# Altium PCB DE-180824.PcbDoc (part 2 of 2)
Units mil, origin at the board's own origin, x right, y up, seen from the top; angles counter-clockwise.
Board outline 4852.2 x 3356.49 mil, 3 copper layers (Top Layer, Mid-Layer 2, Bottom Layer); 131 components, 108 nets, 473 pads, 80 vias.
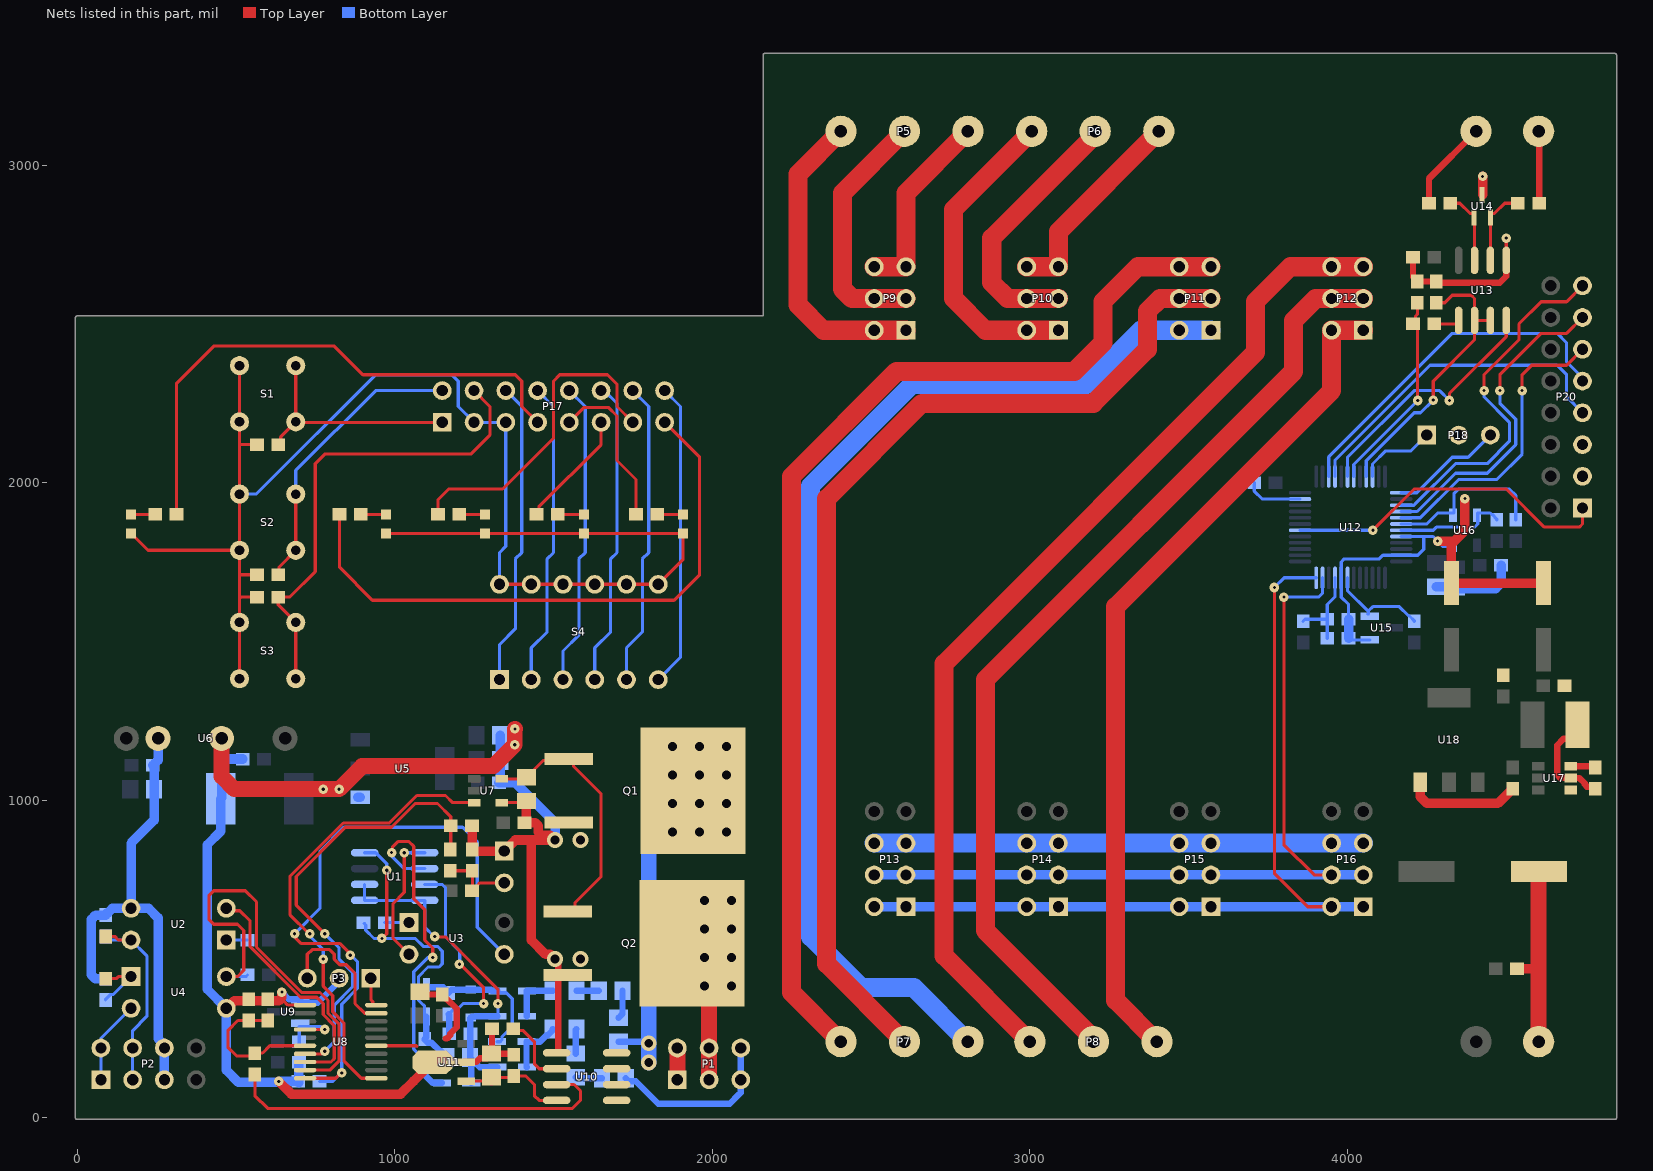
[diagram p3: the nets of this part, all layers, seen from the top]

## Via types
v1: diameter 30, hole 10, Top Layer to Bottom Layer, 54 vias
v2: diameter 50, hole 28, Top Layer to Bottom Layer, 26 vias

## Nets (pads, with @x,y where several pads share a name; then routed paths per layer and width w, separated by ;. In a path a pad name is that pad's centre, name@x,y a point inside that pad or via, vN(x,y) a via of type N, cw(c..) or ccw(c..) an arc to the next point about the centre after c; other vN are vias at no path point) (continued)
BUTTON_UP: P20.1 U12.18 | length 1047.2
  Top Layer w10: v1(4080,1850) 4210,1980 4500,1980 4620,1860 4730,1860 4740,1870 P20.1@4740,1920
  Bottom Layer w10: U12.18@3850.55,1850.16 4079.84,1850.16 v1(4080,1850)
CURRENT: C19.2 R22.1 R37.1 U8.6 | length 458
  Top Layer w10: R37.1@600,306.54 C19.2@540,306.54 506.54,306.54 475,275 475,222.57 502.57,195 551.54,195 R22.1@560,203.46 560.77,204.23 584.23,204.23 607.2,227.2 U8.6@717.8,227.2
DIM1: P5.2 P9.3 P9.4 | length 789.7
  Top Layer w60: P5.2@2605,3106.5 2410,2911.5 2410,2610 2440,2580 P9.4@2510,2580 P9.3@2610,2580
DIM2: P6.2 P10.3 P10.4 | length 842.2
  Top Layer w60: P10.3@3090,2580 P10.4@2990,2580 2930,2580 2880,2630 2880,2770 3186.65,3076.65 3186.65,3076.89 3205.86,3096.1 P6.2@3205.86,3106.5
DIM3: P7.2 P11.3 P11.4 | length 3352.7
  Top Layer w60: P7.2@2605,240 2360,485 2360,1950 2660,2250 3200,2250 3370,2420 3370,2540 3410,2580 P11.4@3470,2580 P11.3@3570,2580
DIM4: P8.2 P12.3 P12.4 | length 3061.6
  Top Layer w60: P8.2@3200,240 3200,250 2860,590 2860,1380 3830,2350 3830,2510 3900,2580 P12.3@4050,2580
GATE: U7.3 U8.11 | length 1467.9
  Top Layer w10: v1@728.79,581.21 670,640 670,760 838.5,928.5 983.5,928.5 1070,1015 1160,1015 1182.4,992.6 U7.3@1250,992.6 ; v1(775,500) 775,415 805,385 805,333.84 840,298.84 840,180 895.16,124.84 U8.11@942.2,124.84
  Bottom Layer w10: v1@728.79,578.79 728.79,576.21 775,530 v1(775,500)
  other v1: 732.5,580
GND: C22.2 C23.1 C24.2 C25.2 C26.2 C27.2 C28.2 C30.2 C31.1 C32.1 C33.2 C34.1 C35.1 C36.2 P13.5 P13.6 P14.5 P14.6 P15.5 P15.6 P16.5 P16.6 P18.2 P20.3 P20.5 P21.1 R25.1 R30.2 U12.8 U12.23 U12.44 U12.47 U13.5 U14.3 U15.1 U16.2 U16.5 U17.4 U18.1 | length 4999.6
  Top Layer w10: U13.5@4500,2700 v1(4500,2770)
  Top Layer w20: C22.2@4206.54,2710 4206.54,2648.9 4220,2635.43 R30.2@4220,2633.46 R25.1@4280,2633.46 4283.46,2630 4480,2630 4500,2650 U13.5@4500,2700
  Top Layer w30: U18.1@4229.45,1057.13 4229.45,1010.55 4250,990 4473.46,990 4513.35,1029.88 4515.31,1029.88 4520,1034.57 C32.1@4520,1036.54 ; v1(4283.77,1816.06) 4326.06,1816.06 ; 4327.1,1816.06 4327.1,1807.1 ; v1(4370,1950) 4370,1850 4327.1,1807.1 ; U14.3@4425.56,2907.34 v1(4425.56,2964.3) ; C31.1@4533.46,470 4601.93,470 ; C33.2@4617.1,1684.14 C36.2@4327.1,1684.14 4327.1,1807.1
  Top Layer w50: P21.1@4601.93,240 4601.93,470 4601.93,774.78 C30.2@4602.9,775.76
  Bottom Layer w10: C26.2@3706.54,2000 3706.54,1973.46 3731.42,1948.58 U12.23@3850.55,1948.58 ; C28.2@4003.46,1510 4008.27,1505.2 U15.1@4070,1505.2 ; C27.2@4003.46,1570 4003.46,1616.54 3980.47,1639.53 U12.8@3980.47,1700.55 3980.47,1750.47 3990,1760 4100,1760 4111.42,1771.42 U12.47@4169.45,1771.42 4221.42,1771.42 4240,1790 4240,1830 ; U12.44@4169.45,1830.47 4269.53,1830.47 4300,1800 4329.84,1800 U16.5@4332.6,1802.76 ; U16.2@4370,1897.24 v1(4370,1950)
  Bottom Layer w30: C28.2@4003.46,1510 C27.2@4003.46,1570 ; C24.2@4280,1672.6 4345.31,1672.6 4350,1667.91 C25.2@4350,1666.54 4466.54,1666.54 4483.46,1683.46 C23.1@4483.46,1740
  Bottom Layer w60: P13.6@2510,865 P13.5@2610,865 P14.6@2990,865 P14.5@3090,865 P15.6@3470,865 P15.5@3570,865 P16.6@3950,865 P16.5@4050,865
GND1: C2.2 C3.1 C4.1 C5.1 C6.1 C9.1 C10.1 C11.1 C13.1 C14.1 C15.1 C16.1 C17.1 C18.1 C19.1 P3.2 P4.1 Q1.3 Q2.3 R13.1 R18.1 R37.2 U4.3 U5.1 U6.4 U7.4 U8.1 U8.15 U9.1 U10.5 U11.2 | length 6133.4
  Top Layer w10: v1@645.2,384.8 650,380 650,368.95 663.95,355 717.64,355 U8.1@717.8,355.16 ; U8.15@921.47,227.2 U8.15@942.2,227.2 1067.8,227.2 1070,225 ; U7.4@1336.62,992.59 1409.99,992.59 R18.1@1415,997.6
  Top Layer w20: C15.1@1080,397.4 1088.94,388.46 C16.1@1150,388.46 1150,386.5 1159.69,376.81 1161.65,376.81 1195,343.46 1195,285 1175,265 1175,260 1165,250 1160,250 ; U11.2@1216.93,175 1218.74,176.81 1257.67,176.81 1268.86,187.99 1290.59,187.99 C10.1@1305,202.4 ; C18.1@1306.54,280 1306.54,203.94 C10.1@1305,202.4 ; C11.1@1375,198.46 1371.06,202.4 C10.1@1305,202.4 ; U10.5@1515,205 v2@1515,500
  Top Layer w30: U4.3@470,345 470.88,345 494.34,368.46 540,368.46 560,368.46 620,368.46 635.39,368.46 645.2,378.28 645.2,384.8 v1(645.2,395.91) ; v1(635,115) 675,75 1018.5,75 1058.5,115 1060,115 1060,116.5 U11.2@1118.5,175 ; U11.2@1117.17,163.67 U11.2@1123.5,170 ; C14.1@1243.46,920 1245,918.46 C13.1@1245,845 1245,844.69 1249.69,840 P4.1@1345,840 1380,875 1430,875 ; C9.1@1408.46,930 C9.1@1410.31,930 ; R18.1@1415,997.6 1415,934.69 C9.1@1410.31,930 ; v2(1505,500) 1490,515 1475,515 1430,560 1430,875 ; C9.1@1410.31,930 1442.31,930 1452.13,920.19 1452.13,899.81 1461.94,890 1490,890 v2(1505,875) 1430,875
  Top Layer w50: U6.4@455,1195 455,1075 495,1035 v1(775,1035) v1(825,1035) 897.71,1107.71 1310.78,1107.71 v1(1377.98,1174.92) 1377.98,1224.49 v1(1378.41,1224.92)
  Bottom Layer w20: v1(645.2,395.91) 667.09,374.02 698.97,374.02 U9.1@702.4,370.59 ; U9.1@702.4,362.4 757.4,362.4 825,430 P3.2@825,440
  Bottom Layer w30: 451.97,901.97 410,860 410,405 U4.3@470,345 470,150 508.19,111.81 631.81,111.81 v1(635,115) R13.1@696.54,115 ; 451.97,903.03 C2.2@451.97,1005 455,1008.03 455,1130 ; U6.4@455,1195 455,1130 ; C6.1@521.54,1130 455,1130 ; R13.1@698.46,110 C17.1@698.46,165 ; U5.1@883.27,1009.45 U5.1@892.13,1009.45 ; C3.1@1332.4,1205 C4.1@1332.4,1125 1332.4,1058.94 C5.1@1328.46,1055 1380,1055 1505,930 v2(1505,875)
  other v2: 1585,500 1585,875
GND2: C7.1 C8.1 P2.5 P2.6 R6.2 R17.2 U2.3 U6.2 | length 1550.8
  Bottom Layer w30: R17.2@90,438.46 56.54,438.46 45,450 45,625 58.46,638.46 R6.2@90,638.46 90,640.43 94.69,645.12 96.65,645.12 111.54,660 U2.3@170,660 ; U6.2@255,1195 255,1126.54 245.12,1116.65 245.12,1114.69 240.43,1110 C7.1@238.46,1110 242.4,1106.06 C8.1@242.4,1035 242.4,937.4 170,865 U2.3@170,660 ; P2.5@275,125 275,229.34 255,249.34 255,630 225,660 U2.3@170,660
I2C1_SCL: R34.1 U12.42 U16.1 | length 526.6
  Bottom Layer w10: U12.42@4169.45,1869.84 4249.84,1869.84 4284.49,1904.49 4335.2,1904.49 4335.2,1965.2 4350,1980 4510,1980 4530,1960 R34.1@4530,1883.46
I2C1_SDA: R35.1 U12.43 U16.3 | length 353.3
  Bottom Layer w10: U12.43@4169.45,1850.16 4169.61,1850 4270,1850 4280,1860 4400,1860 4410,1870 4410,1904.49 4448.98,1904.49 4453.35,1900.12 4455.31,1900.12 4470,1885.43 R35.1@4470,1883.46
L1: Q1.2 R7.1 U10.3 U10.4 | length 922.4
  Bottom Layer w20: R7.1@1705,240.2 1781.69,240.2 v2@1800,221.88
  Bottom Layer w50: v2(1800,175) v2(1800,235) ; v2@1800,240.2 1800,1000
  other v2: 1875,900 1960,900 2045,900 1875,990 1960,990 2045,990 1875,1080 1960,1080 2045,1080 1875,1170 1960,1170 2045,1170
L1IN: P1.1 P1.2 U10.1 U10.2 | length 100
  Top Layer w50: P1.1@1890,120 P1.2@1890,220
LED_CH1: P20.15 U12.39 | length 1122.6
  Top Layer w10: v1(4430,2290) 4430,2340 4540,2450 4540,2500 4610,2570 4690,2570 P20.15@4740,2620
  Bottom Layer w10: U12.39@4169.45,1928.9 4209.43,1928.9 4213.38,1932.85 4213.38,1933.38 4340,2060 4440,2060 4510,2130 4510,2190 4430,2270 v1(4430,2290)
LED_CH2: P20.13 U12.40 | length 1023.1
  Top Layer w10: v1(4480,2290) 4480,2340 4610,2470 4690,2470 P20.13@4740,2520
  Bottom Layer w10: U12.40@4169.45,1909.21 4219.21,1909.21 4340,2030 4440,2030 4530,2120 4530,2200 4480,2250 v1(4480,2290)
LED_CH3: P20.11 U12.41 | length 942.1
  Top Layer w10: v1(4550,2290) 4550,2340 4580,2370 4690,2370 P20.11@4740,2420
  Bottom Layer w10: U12.41@4169.45,1889.53 4229.53,1889.53 4350,2010 4470,2010 4550,2090 v1(4550,2290) v1@4546.17,2286.17
LED_CH4: P20.9 U12.27 | length 1124.8
  Bottom Layer w10: U12.27@3941.1,2019.45 3941.1,2081.1 4330,2470 4660,2470 4690,2440 4690,2380 4740,2330 P20.9@4740,2320
LED_LEARN: P20.7 U12.28 | length 1057.6
  Bottom Layer w10: U12.28@3960.79,2019.45 3960.79,2070.79 4260,2370 4660,2370 4690,2340 4690,2270 P20.7@4740,2220
LIVE1: P5.1 P9.1 P9.2 | length 975.6
  Top Layer w60: P5.1@2405,3106.5 2270,2971.5 2270,2560 2350,2480 P9.2@2510,2480 P9.1@2610,2480
LIVE2: P6.1 P10.1 P10.2 | length 999.8
  Top Layer w60: P6.1@3005.86,3106.5 2760,2860.64 2760,2580 2860,2480 P10.2@2990,2480 P10.1@3090,2480
LIVE3: P7.1 P11.1 P11.2 | length 3514.7
  Bottom Layer w60: P7.1@2805,240 2635,410 2470,410 2310,570 2310,1990 2630,2310 3180,2310 3350,2480 P11.2@3470,2480 P11.1@3570,2480
LIVE4: P8.1 P12.1 P12.2 | length 2675.5
  Top Layer w60: P8.1@3400,240 3270,370 3270,1610 3950,2290 P12.2@3950,2480 P12.1@4050,2480
N1: P1.5 P1.6 R10.1 | length 550.5
  Bottom Layer w20: R10.1@1727.4,125 1737.01,115.39 1759.61,115.39 1830,45 2055,45 2082.6,72.6 2083.12,72.6 2090,79.48 P1.5@2090,120 P1.6@2090,220
NetC1_1: C1.1 D4.2 D5.2 D6.2 D7.1 R14.1 U1.4 U1.5 U1.6 | length 1105.6
  Top Layer w10: v1(1126.11,571.11) 1127.23,570 1160,570 1325,405 v1(1325,360)
  Bottom Layer w10: U1.6@905.51,735 U1.5@905.51,685 U1.4@1094.49,685 1094.49,600.51 1123.89,571.11 v1(1126.11,571.11) ; D5.2@1324.88,320 1325,320.12 v1(1325,360)
  Bottom Layer w20: D4.2@1240,316.1 1242.4,318.5 1251.73,318.5 1253.22,320 D5.2@1323.74,320 ; D4.2@1240.43,315.67 1238.46,313.7 R14.1@1238.46,265 1238.46,191.06 C1.1@1237.4,190 1241.26,186.14 C1.1@1241.26,182.2 ; D7.1@1241.26,110 C1.1@1241.26,182.2 ; D6.2@1323.74,160 1267.4,160 1256.93,170.47 1252.99,170.47 C1.1@1241.26,182.2
NetC1_2: C1.2 D1.1 R3.2 R5.2 U1.8 | length 1053.2
  Top Layer w10: v1(960,565) 975,580 v1(975,780)
  Bottom Layer w10: R3.2@904.23,612.3 909.23,607.3 909.23,590.77 935,565 v1(960,565) 1065,565 1090,540 1135,540 1150,525 1150,485 1140,475 1105,475 1075,445 1075,370 1089.22,355.78 1090.23,355.78 1094.18,351.83 1094.18,324.56 D1.1@1100,318.74 ; U1.8@905.51,835 940,835 975,800 v1(975,780)
  Bottom Layer w20: D1.1@1100,318.74 1100,253.46 R5.2@1095,248.46 1095,246.5 1104.69,236.81 1115.79,236.81 1143.07,209.53 1147.01,209.53 1162.6,193.94 C1.2@1162.6,190
NetC10_2: C10.2 C11.2 U10.8 U11.1 | length 344
  Top Layer w10: U11.1@1224.8,115.94 1296.65,115.94 C10.2@1306.06,106.54 ; C10.2@1305,127.6 1371.06,127.6 C11.2@1375,131.54 1413.46,131.54 1440,105 1440,70 1455,55 U10.8@1510,55
NetC12_1: C12.1 P17.1 S1.1 S1.4 | length 733.4
  Top Layer w10: C12.1@633.46,2120 641.4,2127.93 641.4,2144.23 S1.1@688.58,2191.42 ; S1.4@688.58,2368.58 S1.1@688.58,2191.42 ; P17.1@1150,2190 690,2190 S1.1@688.58,2191.42
NetC12_2: C12.2 C20.2 C21.2 D8.2 D9.2 D10.2 D11.2 D12.2 P17.3 P17.5 S1.2 S1.3 S2.2 S2.3 S3.2 S3.3 S4.7 S4.8 S4.9 S4.10 S4.11 S4.12 | length 4766.1
  Top Layer w10: D12.2@170,1840.47 223.35,1787.13 S2.2@511.42,1787.13 ; S3.2@511.42,1382.83 S3.3@511.42,1560 511.42,1635 ; S1.3@511.42,2368.58 S1.2@511.42,2191.42 511.42,2120 ; C21.2@566.54,1640 516.42,1640 511.42,1635 ; C20.2@566.54,1710 511.42,1710 ; C12.2@566.54,2120 511.42,2120 ; D8.2@972.13,1840.47 D9.2@1283.91,1840.47 D10.2@1595.7,1840.47 D11.2@1907.49,1840.47 1907.49,1757.49 S4.7@1830,1680 S4.8@1730,1680 S4.9@1630,1680 S4.10@1530,1680 S4.11@1430,1680 S4.12@1330,1680 ; 511.42,1635 511.42,1710 ; 511.42,1710 S2.2@511.42,1787.13 ; S2.2@511.42,1787.13 S2.3@511.42,1964.29 511.42,2120
  Bottom Layer w10: S2.3@511.42,1964.29 564.29,1964.29 940,2340 1180,2340 1200,2320 1200,2240 P17.3@1250,2190 P17.5@1350,2190 1350,1800 1330,1780 S4.12@1330,1680
NetC13_2: C13.2 P4.2 R20.1 R21.2 | length 244.8
  Top Layer w10: R21.2@1175,778.07 C13.2@1245,778.07 1245,716.54 R20.1@1243.46,715 ; R20.1@1245.43,715 1260.12,729.69 1260.12,731.65 1268.46,740 P4.2@1345,740
NetC18_2: C18.2 U10.6 | length 226
  Top Layer w10: C18.2@1374.71,275 1405,275 1440,240 1440,170 1455,155 U10.6@1510,155
NetC20_1: C20.1 P17.2 S2.1 S2.4 | length 919
  Top Layer w10: C20.1@633.46,1710 635.69,1712.22 635.69,1734.23 S2.1@688.58,1787.13 S2.4@688.58,1964.29 S2.4@690,1965.71
  Bottom Layer w10: S2.4@688.58,1964.29 688.58,2038.58 940,2290 P17.2@1150,2290
NetC21_1: C21.1 P17.4 S3.1 S3.4 | length 1517.7
  Top Layer w10: S3.1@688.58,1382.83 S3.4@688.58,1560 633.46,1615.12 C21.1@633.46,1640 670,1640 750,1720 750,2060 780,2090 1240,2090 1300,2150 1300,2240 P17.4@1250,2290
NetC27_1: C27.1 C28.1 R36.1 U12.9 | length 279.8
  Bottom Layer w10: R36.1@3860,1563.46 3866.54,1570 C27.1@3936.54,1570 ; C28.1@3936.54,1510 C27.1@3936.54,1570 ; U12.9@3960.79,1700.55 3960.79,1640.79 3936.54,1616.54 C27.1@3936.54,1570
NetC29_1: C29.1 L1.2 U17.5 | length 333.8
  Top Layer w20: L1.2@4724.13,1237.68 4724.13,1221.06 4696.73,1193.66 4680.11,1193.66 4660,1173.54 4660,1080 4670,1070 U17.5@4702.36,1070 4730,1070 4746.81,1053.19 4746.81,1050 4753.7,1043.12 4773.42,1043.12 C29.1@4780,1036.54
NetC29_2: C29.2 U17.6 | length 79.3
  Top Layer w20: U17.6@4702.36,1107.4 4776.06,1107.4 C29.2@4780,1103.46
NetD1_2: D1.2 D2.1 D3.1 D4.1 R4.2 | length 454
  Bottom Layer w10: D3.1@1322.48,240 1332.03,240 1337.85,245.83 1337.85,255.37 1370,287.52 1370,375 1350.83,394.17 1329.57,394.17 D2.1@1323.74,400
  Bottom Layer w20: D1.2@1100,411.26 1152.95,411.26 1159.09,405.12 1160.31,405.12 1170,395.43 1170,394.21 1179.69,403.9 D4.1@1240,403.9 1302.13,403.9 1306.02,400 D2.1@1323.74,400
NetD2_2: D2.2 D5.1 R9.2 | length 161.3
  Bottom Layer w20: D5.1@1416.26,320 D2.2@1416.26,400 R9.2@1497.6,400
NetD3_2: D3.2 D6.1 R12.2 | length 182.2
  Bottom Layer w20: D6.1@1416.26,160 1415.83,160 1415,160.83 D3.2@1415,240 1457.6,240 1478.07,260.47 1482.01,260.47 1497.6,276.06 R12.2@1497.6,280
NetD7_2: D7.2 R5.1 U1.2 | length 1089.5
  Top Layer w10: v1(990.32,835.32) 992.68,837.68 992.68,852.68 1010,870 1045,870 1060,855 1060,690 1095,655 1095,559.8 1120,534.8 v1(1120,505)
  Bottom Layer w10: v1(990.32,835.32) 994.14,831.49 994.14,820.86 1030,785 U1.2@1094.49,785 ; R5.1@1095,181.54 1095,183.5 1080.31,198.19 1078.35,198.19 1060,216.54 1060,460 1106.17,506.17 1118.83,506.17 v1(1120,505)
  Bottom Layer w20: R5.1@1095,181.54 1095,135 1119.17,110.83 1147.91,110.83 D7.2@1148.74,110
NetD8_1: D8.1 R23.2 | length 78.9
  Top Layer w10: R23.2@893.46,1900 971.65,1900 D8.1@972.13,1899.53
NetD9_1: D9.1 R24.2 | length 80.6
  Top Layer w10: R24.2@1203.46,1900 1283.44,1900 D9.1@1283.91,1899.53
NetD10_1: D10.1 R26.2 | length 82.4
  Top Layer w10: R26.2@1513.46,1900 1595.23,1900 D10.1@1595.7,1899.53
NetD11_1: D11.1 R31.2 | length 80.8
  Top Layer w10: R31.2@1826.93,1900 1907.02,1900 D11.1@1907.49,1899.53
NetD12_1: D12.1 R32.2 | length 76.7
  Top Layer w10: D12.1@170,1899.53 246.06,1899.53 R32.2@246.54,1900
NetP17_6: P17.6 S4.1 | length 959.7
  Bottom Layer w10: S4.1@1330,1380 1330,1490 1380,1540 1380,1760 1400,1780 1400,2240 1385.62,2254.38 P17.6@1350,2290
NetP17_7: P17.7 R32.1 | length 1744.5
  Top Layer w10: R32.1@313.46,1900 313.46,2313.46 430,2430 810,2430 900,2340 1380,2340 1400,2320 1400,2240 P17.7@1450,2190
NetP17_8: P17.8 S4.2 | length 959.7
  Bottom Layer w10: S4.2@1430,1380 1430,1480 1480,1530 1480,1760 1500,1780 1500,2240 P17.8@1450,2290
NetP17_9: P17.9 R31.1 | length 515.7
  Top Layer w10: P17.9@1550,2190 1597.2,2237.2 1672.8,2237.2 1700,2210 1700,2070 1760,2010 R31.1@1760,1900
NetP17_10: P17.10 S4.3 | length 959.7
  Bottom Layer w10: S4.3@1530,1380 1530,1470 1580,1520 1580,1760 1600,1780 1600,2240 P17.10@1550,2290
NetP17_11: P17.11 R26.1 | length 374.3
  Top Layer w10: R26.1@1446.54,1900 1454.23,1907.7 1454.23,1924.23 1650,2120 P17.11@1650,2190
NetP17_12: P17.12 S4.4 | length 965.6
  Bottom Layer w10: S4.4@1630,1380 1630,1480 1680,1530 1680,1760 1700,1780 1700,2250 1660,2290 P17.12@1650,2290
NetP17_13: P17.13 R24.1 | length 1031.6
  Top Layer w10: R24.1@1136.54,1900 1136.54,1946.54 1170,1980 1340,1980 1500,2140 1500,2320 1520,2340 1670,2340 1700,2310 1700,2240 P17.13@1750,2190
NetP17_14: P17.14 S4.5 | length 959.7
  Bottom Layer w10: S4.5@1730,1380 1730,1480 1780,1530 1780,1760 1800,1780 1800,2240 P17.14@1750,2290
NetP17_15: P17.15 R23.1 | length 1901.6
  Top Layer w10: R23.1@826.54,1900 826.54,1733.46 930,1630 1880,1630 1960,1710 1960,2080 P17.15@1850,2190
NetP17_16: P17.16 S4.6 | length 959.7
  Bottom Layer w10: S4.6@1830,1380 1900,1450 1900,2240 P17.16@1850,2290
NetP19_1: P19.1 R28.1 | length 288
  Top Layer w20: R28.1@4256.54,2880 4256.54,2957.96 P19.1@4405.07,3106.5
NetP19_2: P19.2 R27.1 | length 227.1
  Top Layer w20: P19.2@4601.93,3106.5 4603.46,3104.96 R27.1@4603.46,2880
NetQ1_1: Q1.1 Q2.1 R18.2 U7.5 | length 811.9
  Top Layer w10: U7.5@1336.62,1067.4 1410,1067.4 R18.2@1415,1072.4 1418.94,1072.4 1439.53,1092.99 1439.53,1096.93 1467.93,1125.34 1543.6,1125.34 Q1.1@1548.27,1130 1549.55,1130 1563.25,1116.3 1563.25,1106.75 1650,1020 1650,760 1568.25,678.25 1568.25,663.7 1554.55,650 Q2.1@1545,650
NetR2_1: R2.1 U2.1 | length 66.5
  Bottom Layer w10: U2.1@470,560 R2.1@536.54,560
NetR3_1: R3.1 U3.1 | length 76.5
  Bottom Layer w10: R3.1@968.46,615 U3.1@1045,615
NetR4_1: R4.1 R14.2 U1.3 | length 672.8
  Top Layer w10: v1(1203.79,483.79) 1206.21,483.79 1280,410 v1(1280,360)
  Bottom Layer w10: U1.3@1094.49,735 1150,735 1160,725 1160,570 1205,525 1205,485 v1(1203.79,483.79) ; R4.1@1170,326.54 1182.7,339.23 1194.23,339.23 1215,360 v1(1280,360)
  Bottom Layer w20: R4.1@1170,326.54 1171.54,325 R14.2@1171.54,265
NetR7_2: R7.2 R8.1 | length 90.1
  Bottom Layer w20: R7.2@1705,315 1717.4,327.4 R8.1@1717.4,400
NetR8_2: R8.2 R9.1 | length 70.2
  Bottom Layer w20: R9.1@1572.4,400 R8.2@1642.6,400
NetR10_2: R10.2 R11.1 | length 83.7
  Bottom Layer w20: R11.1@1570,127.6 1572.6,125 R10.2@1652.6,125
NetR11_2: R11.2 R12.1 | length 78.6
  Bottom Layer w20: R11.2@1570,202.4 1570,277.6 R12.1@1572.4,280
NetR15_2: R15.2 R17.1 U4.1 | length 203.5
  Top Layer w10: R15.2@96.54,445 R15.2@90,438.46 123.46,438.46 130,445 U4.1@170,445
  Bottom Layer w10: R17.1@90,371.54 90,373.5 104.69,388.19 113.19,388.19 U4.1@170,445
NetR19_1: R19.1 U8.4 U9.2 | length 209.3
  Top Layer w10: U8.4@717.8,278.39 717.84,278.34 v1(779.93,278.3) v1(779.93,278.3)
  Bottom Layer w10: R19.1@698.46,230 R19.1@699.8,231.34 ; R19.1@699.8,226.34 699.8,287.6 767.02,287.6 776.32,278.3 v1(779.93,278.3)
NetR22_2: R22.2 U10.7 | length 1231.7
  Top Layer w10: R22.2@560,136.54 560,70 600,30 1560,30 1585,55 1585,85 1565,105 U10.7@1510,105
NetR27_2: R27.2 U13.6 U14.2 | length 246.1
  Top Layer w10: U13.6@4450,2700 4450,2834.86 U14.2@4449.77,2835.09 4449.77,2844.64 4452.65,2847.51 4462.19,2847.51 4494.68,2880 R27.2@4536.54,2880
NetR28_2: R28.2 U13.7 U14.1 | length 235
  Top Layer w10: R28.2@4323.46,2880 4353.68,2880 4386.17,2847.51 4395.72,2847.51 4398.59,2844.64 U14.1@4398.59,2835.09 4400,2833.68 U13.7@4400,2700
NetR29_2: R29.2 U13.1 | length 83.9
  Top Layer w10: R29.2@4273.46,2500 4343.71,2500 4350,2506.29 U13.1@4350,2511.02
NetR33_1: R33.1 U12.7 U15.2 | length 312.7
  Bottom Layer w10: U12.7@4000.16,1700.55 4000.16,1659.84 4063.64,1596.36 ; U15.2@4063.64,1586.36 4065.9,1586.36 4066.36,1586.81 4066.36,1596.36 4080,1610 4163.46,1610 4193.35,1580.12 4195.31,1580.12 4210,1565.43 R33.1@4210,1563.46
NetU1_1: U1.1 U3.2 | length 419.7
  Top Layer w10: v1(1030,835) 1030,710 995,675 995,565 U3.2@1045,515
  Bottom Layer w10: v1(1030,835) U1.1@1094.49,835
NEUTRAL1: P5.3 P9.5 P9.6 | length 607.3
  Top Layer w60: P9.6@2510,2680 P9.5@2610,2680 2610,2911.5 P5.3@2805,3106.5
NEUTRAL2: P6.3 P10.5 P10.6 | length 657.3
  Top Layer w60: P10.6@2990,2680 P10.5@3090,2680 3090,2790.64 P6.3@3405.86,3106.5
NEUTRAL3: P7.3 P11.5 P11.6 | length 3513.7
  Top Layer w60: P7.3@2405,240 2250,395 2250,2020 2580,2350 3140,2350 3230,2440 3230,2570 3340,2680 P11.6@3470,2680 P11.5@3570,2680
NEUTRAL4: P8.3 P12.5 P12.6 | length 3233.3
  Top Layer w60: P8.3@3000,240 2730,510 2730,1430 3710,2410 3710,2570 3820,2680 P12.6@3950,2680 P12.5@4050,2680
NTC: C14.2 R21.1 U8.7 | length 1433.7
  Top Layer w10: U8.7@717.8,201.61 771.61,201.61 v1(780,210) v1@774.59,210 ; v1(780,580) 690,670 690,760 845,915 990,915 1065,990 1134.72,990 1176.54,948.19 1176.54,846.54 R21.1@1175,845
  Bottom Layer w10: v1(780,210) 810,240 810,355 867.4,412.4 867.4,457.56 825,499.96 825,535 v1(780,580)
OUT1: P1.3 P1.4 Q2.2 | length 571.2
  Top Layer w50: v2(1975,685) v2(1975,595) v2(1975,505) v2(1975,415) 1990,400 P1.4@1990,220 P1.3@1990,120
  other v2: 2060,415 2060,505 2060,595 2060,685
RX: P13.3 P13.4 P14.3 P14.4 P15.3 P15.4 P16.3 P16.4 U12.11 | length 2684.6
  Top Layer w10: v1(3800,1640) 3800,860 3895,765 P16.4@3950,765
  Bottom Layer w10: v1(3800,1640) 3910,1640 3921.42,1651.42 U12.11@3921.42,1700.55
  Bottom Layer w30: P13.4@2510,765 P13.3@2610,765 P14.4@2990,765 P14.3@3090,765 P15.4@3470,765 P15.3@3570,765 P16.4@3950,765 P16.3@4050,765
RX2: P2.3 P2.4 R1.2 R6.1 U2.4 | length 657.2
  Top Layer w10: R1.2@90,571.54 118.46,571.54 130,560 U2.4@170,560 U2.4@160.61,569.39
  Bottom Layer w10: R6.1@90,571.54 101.54,560 U2.4@170,560 220,510 220,320 175,275 P2.3@175,125
SWCLK: P18.3 U12.37 | length 355.8
  Bottom Layer w10: U12.37@4169.45,1968.27 4218.27,1968.27 4330,2080 4380,2080 P18.3@4450,2150
SWCLK1: P3.1 U8.20 | length 97.6
  Top Layer w10: P3.1@925,440 925,372.36 930.77,366.59 930.77,356.9 932.51,355.16 U8.20@942.2,355.16
SWDIO: P18.1 U12.34 | length 248.3
  Bottom Layer w10: U12.34@4078.9,2019.45 4078.9,2058.9 4120,2100 4200,2100 P18.1@4250,2150
SWDIO1: P3.3 U8.19 | length 445.9
  Top Layer w10: P3.3@725,440 725,515 740,530 795,530 810,515 810,500 827.6,482.4 847.6,482.4 875,455 875,360 905.42,329.59 U8.19@942.2,329.57
TX: P13.1 P13.2 P14.1 P14.2 P15.1 P15.2 P16.1 P16.2 U12.12 | length 2807.9
  Top Layer w10: v1(3770,1670) 3770,770 3875,665 P16.2@3950,665
  Bottom Layer w10: v1(3770,1670) 3800.55,1700.55 U12.12@3901.73,1700.55
  Bottom Layer w30: P13.2@2510,665 P13.1@2610,665 P14.2@2990,665 P14.1@3090,665 P15.2@3470,665 P15.1@3570,665 P16.2@3950,665 P16.1@4050,665
TX2: P2.1 P2.2 U4.2 | length 259.4
  Bottom Layer w10: P2.1@75,125 75,225 75,250 U4.2@170,345
USART1_DE: R25.2 U12.33 U13.2 U13.3 | length 897.3
  Top Layer w10: v1(4270,2260) 4270,2320 4400,2450 U13.2@4400,2511.02 ; R25.2@4280,2566.54 4306.54,2566.54 4330,2590 4390,2590 4400,2580 U13.2@4400,2511.02 ; U13.3@4450,2511.02 U13.2@4400,2511.02
  Bottom Layer w10: U12.33@4059.21,2019.45 4059.21,2069.21 4210,2220 4230,2220 v1(4270,2260)
USART1_RX: R29.1 R30.1 U12.31 | length 642.2
  Top Layer w10: R30.1@4220,2566.54 4220,2530 4214.23,2524.23 4214.23,2507.7 R29.1@4206.54,2500 4220,2486.54 4220,2260 v1(4221.21,2258.79)
  Bottom Layer w10: U12.31@4019.84,2019.45 4019.84,2057.42 v1(4221.21,2258.79)
USART1_TX: U12.30 U13.4 | length 807.9
  Top Layer w10: v1(4321.21,2258.79) 4321.21,2281.21 4500,2460 U13.4@4500,2511.02
  Bottom Layer w10: U12.30@4000.16,2019.45 4000.16,2080.16 4210,2290 4290,2290 v1(4321.21,2258.79)
USART_RX: R16.1 U4.4 U8.9 | length 1387.9
  Top Layer w10: U4.4@470,445 505,445 525,465 525,590 505,610 430,610 415,625 415,700 430,715 530,715 565,680 565,537.63 707.63,395 765,395 790,370 790,329.75 825,294.75 825,180 795.43,150.43 U8.9@717.8,150.43
  Bottom Layer w10: U4.4@470,445 531.54,445 R16.1@536.54,450
USART_TX: U2.2 U8.8 | length 761.5
  Top Layer w10: U2.2@470,660 477.64,652.36 512.64,652.36 545,620 545,538.54 703.54,380 755,380 775,360 775,325.65 810,290.65 810,186.52 799.51,176.02 U8.8@717.8,176.02
ZEROCROSS: R13.2 U3.3 U8.10 | length 2044.3
  Top Layer w10: v1(685,580) 688.83,576.17 688.83,566.17 706.21,548.79 828.24,548.79 860.21,516.82 v1(860.21,512.37) ; U8.10@717.8,124.84 814.87,124.84 831.68,141.65 v1(833.35,141.65)
  Bottom Layer w10: v1(685,580) 765,660 765,840 840,915 1213.89,915 1260,868.89 1260,600 U3.3@1345,515 ; R13.2@763.46,115 805,115 831.65,141.65 v1(833.35,141.65) 833.35,358.35 882.6,407.6 882.6,492.4 862.63,512.37 v1(860.21,512.37)
pads on no net: U1.7 U7.1 U8.2 U8.3 U8.12 U8.13 U8.14 U8.17 U8.18 U12.2 U12.3 U12.4 U12.5 U12.6 U12.10 U12.13 U12.14 U12.15 U12.16 U12.17 U12.29 U12.32 U12.35 U12.36 U12.38
copper on no net: | length 1261.3
  Top Layer w10: 942.2,150.43 942.32,150.32 1000.13,150.32 ; 942.2,176.02 998.98,176.02 1000,175 ; 942.2,201.61 998.39,201.61 1000,200 ; 942.2,278.39 1003.39,278.39 1005,280 ; 942.2,303.98 1003.98,303.98 1005,305
  Mid-Layer 2 w80: 3010,555 3970,555

## Polygon pours and split planes (outlines as drawn)
GND on Top Layer "GND_L01_P001" (solid, pour order 1): 4840,3350 4150,3350 4150,2310 3680,1840 3680,0 4830,0 4840,10
NetC12_2 on Top Layer "NETC12_2_L01_P000" (solid, remove dead copper, pour order 0): 0,2520 2160,2520 2160,1300 0,1300
GND on Bottom Layer "GND_L03_P002" (solid, pour order 2): 4840,3350 4840,0 3740,0 3740,1010 3470,1280 3470,2120 3630,2280 4050,2280 4160,2390 4160,3350

## Keep-outs
Keep-Out Layer:
  lines w10: 0,1300 0,2520 2165,2520 ; 0,0 0,1299.21 2165.35,1299.21 2165.35,0 0,0 ; 2165,0 4842.17,0 4842.17,3346.46 2165,3346.46 2165,0

## Other copper
Top Layer:
  rectangle net 3V3: 4130,1140 4510,1330
  rectangle net 5V: 4550,1100 4610,1250
  rectangle: 990.46,194.02 1025.46,209.33
  rectangle: 989.89,142.8 1024.89,158.11
  rectangle: 990.29,168.02 1025.29,183.33
  rectangle: 989.83,270.95 1014.79,286.26
  rectangle: 990.04,296.8 1015,312.11
  rectangle net GND1: 1033.53,142.61 1068.53,157.92
  rectangle net GND1: 1033.91,167.93 1068.91,183.24
  rectangle net GND1: 1034.16,193.69 1069.16,209
  rectangle net +3V3_1: 1023.06,296.9 1061.96,312.21
  rectangle net GND1: 1045,100 1185,270
  rectangle net GND1: 1475,460 1615,530
  rectangle net GND1: 1475,845 1620,930
  rectangle net L1: 1675,145 1825,260
  rectangle net L1IN: 1665,45 1920,115
Bottom Layer:
  region net GND1: 1400,1235 1330,1235 1330,1150 1400,1150
  rectangle net GND1: 765,970 910,1055
  rectangle net GND1: 1475,465 1615,910
  rectangle net OUT1: 1895,350 2120,745
  rectangle net L1: 1775,830 2105,1230
  rectangle net +3V3_1: 950,940 1260,1255

## Silkscreen, mask and mechanical layers (free items; w line width, h text height)
Top Overlay:
  lines w10: 760,840 760,635 775,620 835,620 945,510 980,510 995,495 995,130 1050,130 1060,140 1060,300 1040,320 1000,320
  text "N1  CH1  L1" at 2850,3330 h50 r180
  text "N2  CH2  L2" at 3460,3330 h50 r180
  text "A RS485 B" at 4675,3320 h40 r180
  text "JUBERA d.o.o. Sarajevo" at 2300,2000 h60
  text "Bosna i Hercegovina" at 2310,1850 h60
  text "www.imedia.ba" at 2570,1560 h60
  text "member of iMedia Group" at 2310.24,1420 h60
  text "DE-180824" at 2310,1160 h60
  text "OCT. 2024." at 3040,1160 h60
  text "A0" at 780,807.18 h20
  text "A1" at 780,765.38 h20
  text "A2" at 780,723.59 h20
  text "A3" at 780,681.79 h20
  text "A4" at 780,640 h20
  text "N3  CH3  L3" at 2320,20 h50
  text "N4  CH4  L4" at 2950,20 h50
  text "+12V  GND" at 4310,20 h45
Bottom Overlay:
  drawing of 3 lines, arcs and shapes, not listed
  text "!!! WARNING !!!" at 3280,1990 h60
  text "220 V" at 3132,1572.12 h70
  text "HIGH VOLTAGE" at 3320,1310 h60
Top Paste:
  rectangle: 1033.46,142.6 1047.57,157.93
  rectangle: 1033.86,167.94 1047.97,183.27
  rectangle: 1034.14,193.7 1048.25,209.03
  rectangle: 1005.21,142.74 1024.92,158.14
  rectangle: 1005.59,168 1025.3,183.41
  rectangle: 1005.82,193.99 1025.53,209.4
  rectangle: 1023.06,270.86 1037.17,286.19
  rectangle: 1023.08,296.97 1037.19,312.3
  rectangle: 995.45,296.77 1014.98,312.1
  rectangle: 995.07,270.86 1014.78,286.27
Top Solder:
  rectangle: 1020.14,267.44 1039.65,289.48
  rectangle: 1020.26,293.01 1039.65,314.76
  rectangle: 988.66,293.01 1017.08,314.76
  rectangle: 988.4,267.46 1016.82,289.21
  rectangle: 1030.88,190.5 1054.56,212.25
  rectangle: 1030.96,164.72 1054.64,186.48
  rectangle: 988.58,190.59 1027.92,212.47
  rectangle: 988.68,165.07 1027.84,186.94
  rectangle: 1030.96,139.18 1054.64,160.94
  rectangle: 988.54,139.18 1027.8,161.06
Mechanical 1:
  lines w10: 2187.56,570 2187.56,2735.35 2659.45,2735.35 2659.45,570 2187.56,570 ; 2667.56,570 2667.56,2735.35 3139.45,2735.35 3139.45,570 2667.56,570 ; 3147.56,570 3147.56,2735.35 3619.45,2735.35 3619.45,570 3147.56,570 ; 3627.56,570 3627.56,2735.35 4099.45,2735.35 4099.45,570 3627.56,570

## Text inside footprints (layer, text, board x,y; h text height)
P9: Top Overlay "1" at 2630,2400 h20 r90
P10: Top Overlay "1" at 3110,2400 h20 r90
P11: Top Overlay "1" at 3590,2400 h20 r90
P12: Top Overlay "1" at 4070,2400 h20 r90
P13: Top Overlay "1" at 2630,585 h20 r90
P14: Top Overlay "1" at 3110,585 h20 r90
P15: Top Overlay "1" at 3590,585 h20 r90
P16: Top Overlay "1" at 4070,585 h20 r90
P17: Top Overlay "2" at 1050,2270 h20; Top Overlay "1" at 1050,2170 h20; Top Overlay "15" at 1910,2170 h20; Top Overlay "16" at 1910,2270 h20
P20: Top Overlay "1" at 4750,1820 h20